# Altium PCB BEESC_v1.PcbDoc (part 4 of 4)
Units mm, origin at the board's own origin, x right, y up, seen from the top; angles counter-clockwise.
Board outline 50 x 44.5 mm, 6 copper layers (Top Layer, GND, SIG, SIG/PWR, GND2, Bottom Layer), stack 1.481 mm thick; 122 components, 109 nets, 495 pads, 357 vias.
Unrouted connection lines stored in the file: 71.
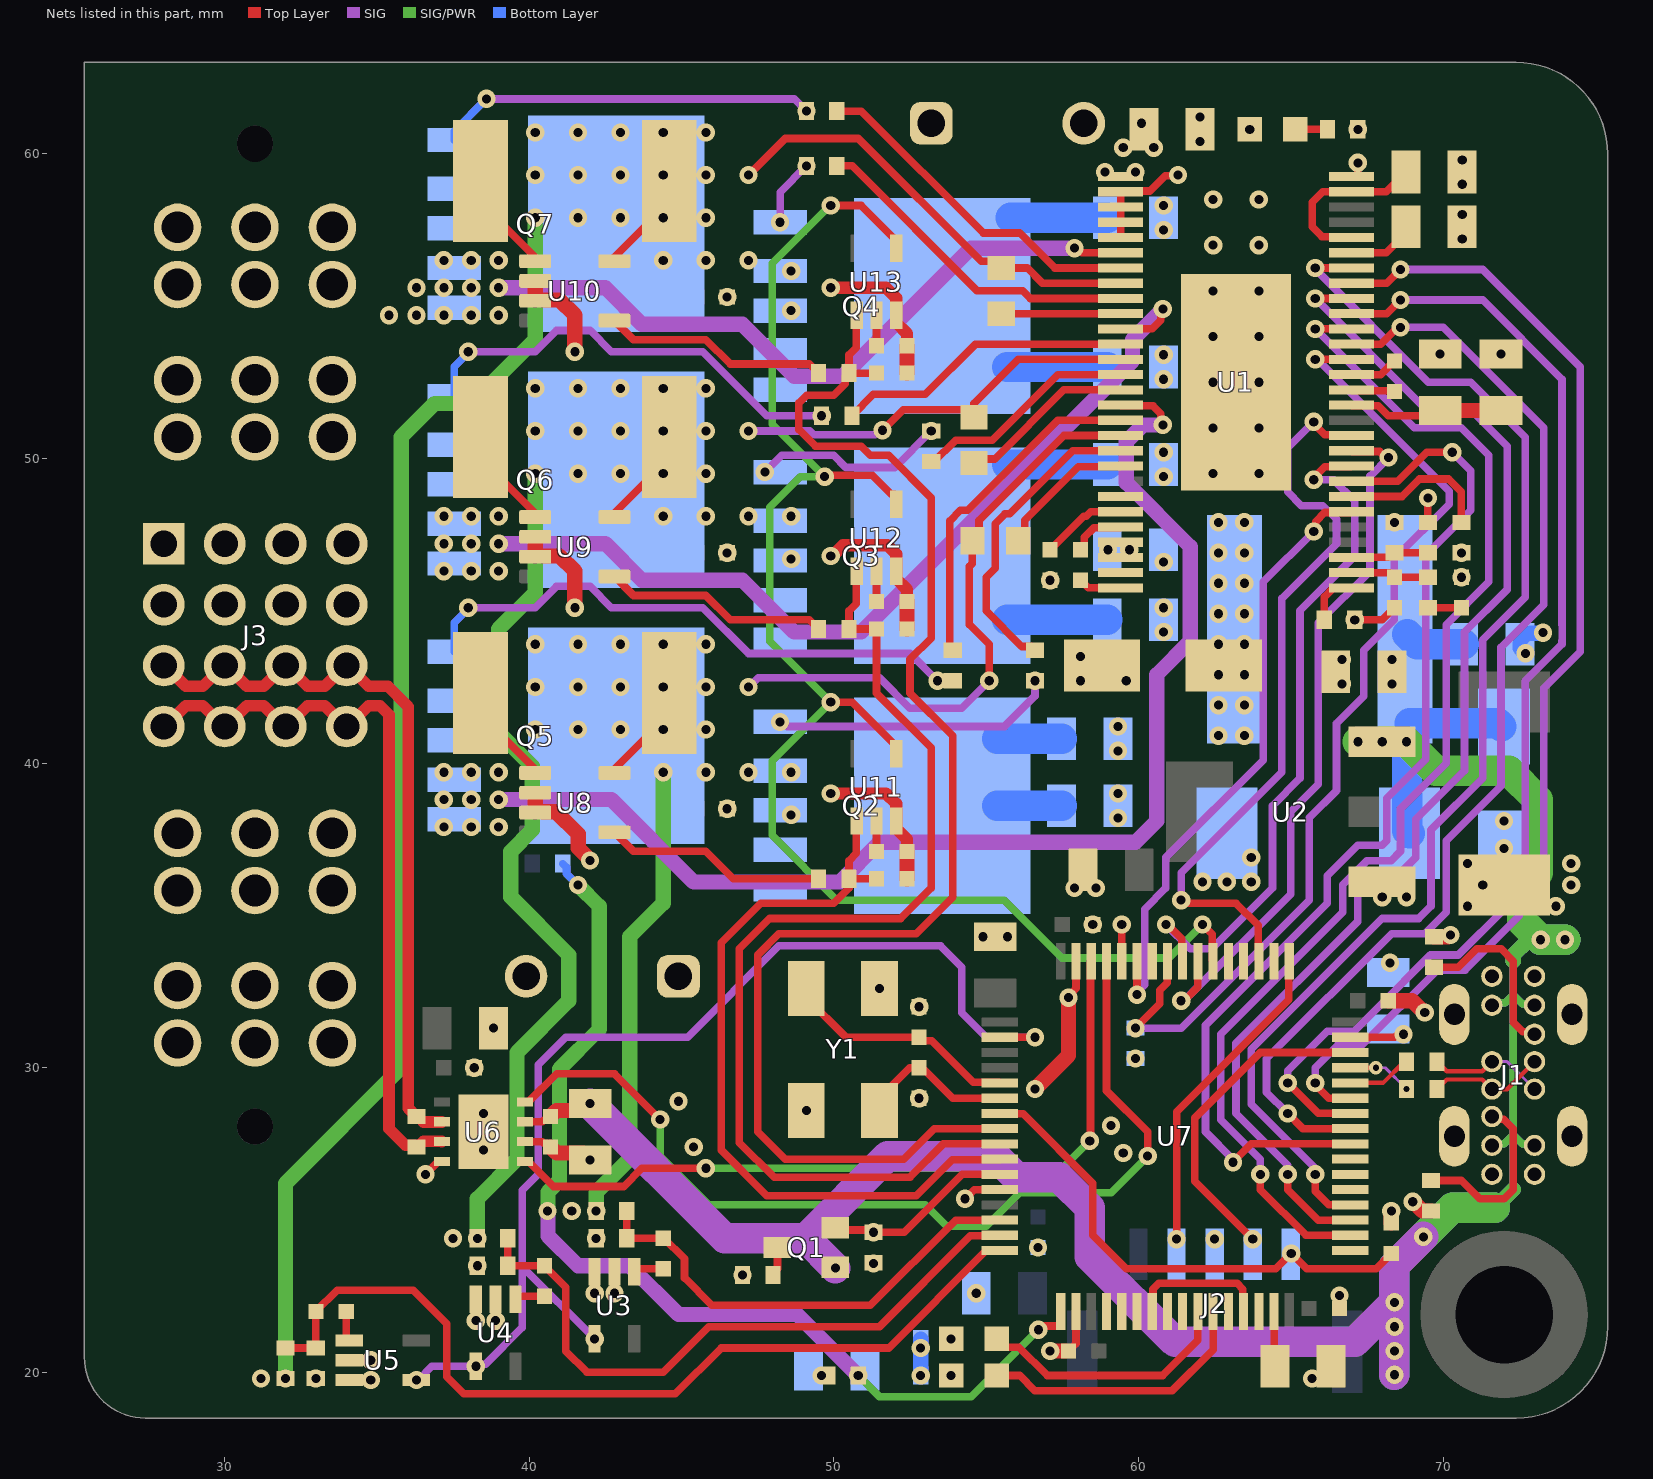
[diagram p6: the nets of this part, all layers, seen from the top]

## Via types
v1: diameter 0.6, hole 0.3, Top Layer to Bottom Layer, tented both sides, 355 vias
v2: diameter 0.45, hole 0.2, Top Layer to Bottom Layer, tented both sides, 2 vias

## Nets (pads, with @x,y where several pads share a name; then routed paths per layer and width w, separated by ;. In a path a pad name is that pad's centre, name@x,y a point inside that pad or via, vN(x,y) a via of type N, cw(c..) or ccw(c..) an arc to the next point about the centre after c; other vN are vias at no path point) (continued)
+5: C8.1 C10.2 C11.1 C23.1 C24.1 D2.1 J1.A4 J1.A9 J1.B4 J1.B9 L1.2 Q1.1 R4.1 U2.3 U6.3 | length 104.8
  Top Layer w0.25: U6.3@39.862,28.225 40.429,28.225 40.479,28.275 40.575,28.275 C24.1@40.7,28.4
  Top Layer w0.5: C24.1@40.7,28.4 40.9,28.6 41.775,28.6 v1(42,28.825)
  SIG w1: v1(42,28.825) 46.425,24.4 49.075,24.4 ; v1(50.05,23.425) 49.075,24.4 ; v1(68.4,19.921) v1(68.4,20.7) v1(68.4,21.5) v1(68.4,22.3) ; v1(69.35,24.45) 68.4,23.5 v1(68.4,22.3) ; 49.075,24.4 51.775,27.1 55.3,27.1 56,26.4 57.4,26.4 58.4,25.4 58.4,23.8 61.2,21 67.1,21 v1(68.4,22.3)
  SIG/PWR w0.25: J1.B4@71.6,27.45 71.65,27.5 72,27.5 72.3,27.8 ; J1.B9@71.6,32.05 71.686,32.136 72.036,32.136 72.3,32.4 ; 72.3,26 72.3,27.8 ; 72.3,33.5 72.3,32.4 ; J1.A9@73,27.45 72.95,27.5 72.6,27.5 72.3,27.8 ; J1.A4@73,32.05 72.95,32.1 72.6,32.1 72.3,32.4 ; 72.3,27.8 72.3,32.4
  SIG/PWR w0.5: 71.7,25.4 72.3,26 ; 72.3,33.5 72.3,33.7 72.781,34.181 73.181,34.181 v1(73.2,34.2)
  SIG/PWR w1: v1(67.2,40.7) v1(68,40.7) v1(68.8,40.7) 69.76,39.74 72.16,39.74 73.1,38.8 73.1,36.4 72.6,35.9 72.6,34.8 v1(73.2,34.2) v1(74,34.2) ; v1(68.4,19.921) v1(68.4,20.7) v1(68.4,21.5) v1(68.4,22.3) 68.4,23.5 v1(69.35,24.45) 70.3,25.4 71.7,25.4
  Bottom Layer w0.25: J1.B4@71.6,27.45 71.65,27.5 72,27.5 72.3,27.8 ; J1.B9@71.6,32.05 71.686,32.136 72.036,32.136 72.3,32.4 ; 72.3,26 72.3,27.8 ; 72.3,33.5 72.3,32.4 ; J1.A9@73,27.45 72.95,27.5 72.6,27.5 72.3,27.8 ; J1.A4@73,32.05 72.95,32.1 72.6,32.1 72.3,32.4 ; 72.3,27.8 72.3,32.4
  Bottom Layer w0.5: 71.7,25.4 72.3,26 ; 72.3,33.5 72.3,33.7 72.781,34.181 73.181,34.181 v1(73.2,34.2)
  Bottom Layer w1: v1(68.4,19.921) v1(68.4,20.7) v1(68.4,21.5) v1(68.4,22.3) 68.4,23.5 v1(69.35,24.45) 70.3,25.4 71.7,25.4 ; L1.2@68.825,40.7 68.825,37.775 C10.2@68.9,37.7 ; L1.2@68.825,44.225 69.15,43.9 C11.1@70.675,43.9 ; L1.2@68.9,41.3 71.8,41.3 D2.1@71.9,41.2 ; v1(73.2,34.2) v1(74,34.2)
  other v1: 68.325,42.6 68.325,43.4 68.4,47.9
ADC_15: U7.25
ADC_TEMP: C56.1 R33.1 R34.2 U7.17 | length 33.9
  Top Layer w0.25: v1(56.713,21.4) 56.807,21.4 56.932,21.525 57.425,21.525 57.45,21.55 U7.17@57.45,22
  SIG w0.5: v1@40.619,25.281 40.619,24.481 41.6,23.5 43.3,23.5 44.9,21.9 48.8,21.9 v1(50.8,19.9)
  SIG/PWR w0.25: v1(50.8,19.9) 51.5,19.2 54.513,19.2 v1(56.713,21.4)
  SIG/PWR w0.5: v1@40.619,25.281 v1(40.6,25.3) 40.619,25.319 40.619,25.919 41,26.3 41,29.963 42.3,31.263 42.3,35.3 v1(41.6,36)
  Bottom Layer w0.25: R33.1@41.1,36.7 41.225,36.575 41.225,36.375 v1(41.6,36)
AN_IN: Q1.2 R12.2 U7.11 | length 6.2
  Top Layer w0.25: Q1.2@50.05,24.75 50.125,24.675 51.225,24.675 v1(51.3,24.6) 52.316,24.6 54.216,26.5 U7.11@55.45,26.5
C_A: R30.1 U8.5 | length 7.3
  Top Layer w0.25: U8.5@42.8,37.725 43.425,37.1 45.8,37.1 46.7,36.2 R30.1@49.5,36.2
C_B: R31.1 U9.5 | length 7.4
  Top Layer w0.25: U9.5@42.8,46.125 43.425,45.5 45.8,45.5 46.6,44.7 49.2,44.7 R31.1@49.5,44.4
C_C: R32.1 U10.5 | length 7.4
  Top Layer w0.25: U10.5@42.8,54.525 43.425,53.9 45.8,53.9 46.6,53.1 49.2,53.1 R32.1@49.5,52.8
CAN_N: J3.A03 J3.B03 J3.C03 J3.D03 R20.1 U6.6 | length 24.8
  Top Layer w0.381: J3.A03@28.01,43.2 28.044,43.2 28.727,42.518 29.293,42.518 29.976,43.2 J3.B03@30.01,43.2 30.044,43.2 30.727,42.518 31.293,42.518 31.976,43.2 J3.C03@32.01,43.2 32.044,43.2 32.727,42.518 33.293,42.518 33.976,43.2 J3.D03@34.01,43.2 34.044,43.2 34.727,42.518 35.366,42.518 36.035,41.849 36.035,28.665 R20.1@36.3,28.4 36.35,28.4 36.532,28.218 37.13,28.218 U6.6@37.138,28.225
CAN_P: J3.A04 J3.B04 J3.C04 J3.D04 R20.2 U6.7 | length 25.1
  Top Layer w0.381: J3.A04@28.01,41.2 28.044,41.2 28.727,41.883 29.293,41.883 29.976,41.2 J3.B04@30.01,41.2 30.044,41.2 30.727,41.883 31.293,41.883 31.976,41.2 J3.C04@32.01,41.2 32.044,41.2 32.727,41.883 33.293,41.883 33.976,41.2 J3.D04@34.01,41.2 34.044,41.2 34.727,41.883 35.103,41.883 35.4,41.586 35.4,28 35.94,27.46 36.241,27.46 R20.2@36.3,27.4 36.35,27.4 36.532,27.583 37.13,27.583 U6.7@37.138,27.575
CAN_RX: U6.4 U7.61 | length 31.5
  Top Layer w0.25: U6.4@39.862,28.875 39.975,28.875 40.9,29.8 42.8,29.8 v1(44.3,28.3) ; U7.61@58.95,33.5 58.95,29.25 60.3,27.9 v1(60.3,27.1)
  SIG/PWR w0.25: v1(44.3,28.3) 44.3,27.1 45.9,25.5 53,25.5 53.7,24.8 55,24.8 56.1,25.9 59.1,25.9 v1(60.3,27.1)
CAN_TX: U6.1 U7.62 | length 25.7
  Top Layer w0.25: U6.1@39.862,26.925 39.975,26.925 40.8,26.1 43.1,26.1 43.7,26.7 v1(45.8,26.7) ; v1(58.4,27.6) 58.425,27.625 58.425,33.475 U7.62@58.45,33.5
  SIG/PWR w0.25: v1(45.8,26.7) 55.9,26.7 56.2,26.4 57.2,26.4 v1(58.4,27.6)
CS: U1.8 U7.40 | length 35.8
  Top Layer w0.25: v1(63.1,26.9) 63.7,27.5 U7.40@66.95,27.5 ; U1.8@66.988,49.25 68.514,49.25 69.464,50.2 v1(70.3,50.2)
  SIG w0.25: v1(63.1,26.9) 63.1,26.995 62.2,27.895 62.2,31.4 66.2,35.4 66.2,36.3 67.2,37.3 68.004,37.3 68.15,37.446 68.15,38.85 69.425,40.125 69.425,46.825 70.9,48.3 70.9,49.6 v1(70.3,50.2)
CURR_A: C48.1 R30.2 U7.10 U11.1 | length 25.2
  Top Layer w0.25: U11.1@50.75,38.1 50.735,38.084 50.735,37.034 50.5,36.8 R30.2@50.5,36.2 ; C48.1@51.4,36.2 R30.2@50.5,36.2 ; U7.10@55.45,27 55.435,26.985 53.885,26.985 52.7,25.8 47.8,25.8 46.3,27.3 46.3,34.1 47.6,35.4 50,35.4 50.5,35.9 R30.2@50.5,36.2
CURR_B: C50.1 R31.2 U7.9 U12.1 | length 35.1
  Top Layer w0.25: U12.1@50.75,46.3 50.735,46.284 50.735,45.234 50.5,45 R31.2@50.5,44.4 C50.1@51.4,44.4 51.4,42.3 53.2,40.5 53.2,35.9 52.2,34.9 47.9,34.9 46.9,33.9 46.9,27.545 48.045,26.4 52.5,26.4 53.6,27.5 U7.9@55.45,27.5
CURR_C: C52.1 R32.2 U7.8 U13.1 | length 46.3
  Top Layer w0.25: U13.1@50.75,54.7 50.735,54.685 50.735,53.635 50.5,53.4 R32.2@50.5,52.8 ; C52.1@51.4,52.8 R32.2@50.5,52.8 ; 54.85,28 53.3,28 52.3,27 48.4,27 47.5,27.9 47.5,33.7 48.2,34.4 52.7,34.4 53.9,35.6 53.9,40.9 52.5,42.3 52.5,43.4 53.2,44.1 53.2,48.7 51.8,50.1 51.2,50.1 50.9,50.4 49.4,50.4 48.85,50.95 48.85,51.818 49.107,52.075 49.994,52.075 50.375,52.456 50.375,52.675 R32.2@50.5,52.8
CURR_FILTER: U7.54 U11.4 U12.4 U13.4 | length 51.4
  Top Layer w0.25: v1(49.7,49.4) 49.75,49.45 51.263,49.45 51.888,48.825 51.975,48.825 52.05,48.75 U12.4@52.05,48.5 ; v1(49.9,42) 50.6,42 52.05,40.55 U11.4@52.05,40.3 ; v1(49.9,58.3) 50.9,58.3 52.05,57.15 U13.4@52.05,56.9 ; v1(62.1,34.7) 62.425,34.375 62.425,33.525 U7.54@62.45,33.5
  SIG/PWR w0.25: v1(49.9,58.3) 49.866,58.3 47.975,56.409 47.975,51.125 v1(49.7,49.4) 48.9,49.4 47.9,48.4 47.9,44 v1(49.9,42) 47.975,40.075 47.975,37.625 50.1,35.5 55.6,35.5 57.5,33.6 61,33.6 v1(62.1,34.7)
D2_N: J1.A7 J1.B7 R36.1 | length 3.8
  Top Layer w0.146: R36.1@69.8,30.2 70.114,29.886 71.286,29.886 J1.B7@71.6,30.2
  SIG w0.097: J1.B7@71.6,30.2 72.1,30.2 J1.A7@73,29.3
D2_P: J1.A6 J1.B6 R35.1 | length 3.8
  Top Layer w0.146: R35.1@69.8,29.3 70.114,29.614 71.286,29.614 J1.B6@71.6,29.3 72.1,29.3 J1.A6@73,30.2
D_N: R36.2 U7.44 | length 2.1
  Top Layer w0.146: U7.44@66.95,29.5 68.025,29.5 68.725,30.2 R36.2@68.8,30.2
D_P: R35.2 U7.45 | length 2.1
  Top Layer w0.146: U7.45@66.95,30 v2(67.791,30)
  SIG w0.097: v2(67.791,30) 68.1,30 v2(68.8,29.3)
EN_BUCK: U1.55
EN_GATE: R6.2 U1.16 U7.57 | length 32.8
  Top Layer w0.25: v1(59.9,31.3) 60.7,32.1 60.7,32.54 60.95,32.79 U7.57@60.95,33.5 ; v1(65.8,53.25) U1.16@66.988,53.25
  SIG w0.25: v1(59.9,31.3) 61.4,31.3 65.6,35.5 65.6,38.2 66.5,39.1 66.5,41.3 67.4,42.2 67.4,43.7 68.4,44.7 68.4,46.7 70.2,48.5 70.2,48.921 65.871,53.25 v1(65.8,53.25)
FAULT: U1.6 U7.59 | length 20.4
  Top Layer w0.25: v1(59.95,32.4) U7.59@59.95,33.5 ; v1(65.75,47.6) 65.817,47.667 65.817,47.927 66.116,48.225 66.963,48.225 U1.6@66.988,48.25
  SIG w0.25: v1(59.95,32.4) 59.95,32.471 60.2,32.721 60.2,35.2 60.9,35.9 60.9,36.9 64.1,40.1 64.1,45.949 v1(65.75,47.6)
GH_A: R21.1 U1.47 | length 10.2
  Top Layer w0.25: R21.1@56.6,43.7 56.475,43.825 56.175,43.825 55,45 55,46.1 55.3,46.4 55.3,47.86 55.62,48.18 55.78,48.18 57.85,50.25 U1.47@59.412,50.25
GH_B: R22.1 U1.42 | length 7.4
  Top Layer w0.25: R22.1@53.25,49.85 54,50.6 55.2,50.6 57.35,52.75 U1.42@59.412,52.75
GH_C: R23.1 U1.37 | length 11.1
  Top Layer w0.25: R23.1@50.1,59.6 50.6,59.6 54.7,55.5 56.2,55.5 56.45,55.25 U1.37@59.412,55.25
GL_A: R27.1 U1.45 | length 11.3
  Top Layer w0.25: R27.1@53.9,43.7 53.8,43.8 53.8,47.944 54.156,48.3 54.4,48.3 57.35,51.25 U1.45@59.412,51.25
GL_B: R28.1 U1.40 | length 9.8
  Top Layer w0.25: R28.1@50.6,51.4 51.3,52.1 53,52.1 54.65,53.75 U1.40@59.412,53.75
GL_C: R29.1 U1.35 | length 11.4
  Top Layer w0.25: R29.1@50.1,61.4 50.9,61.4 54.9,57.4 56.1,57.4 57.25,56.25 U1.35@59.412,56.25
GND: C1.2 C2.2 C3.2 C4.2 C6.1 C7.2 C8.2 C10.1 C11.2 C13.2 C14.2 C17.2 C18.2 C19.2 C23.2 C24.2 C25.2 C26.2 C27.2 C28.2 C29.1 C30.1 C31.2 C32.2 C33.2 C34.2 C35.2 C36.2 C37.2 C38.2 C39.2 C40.2 C41.2 C42.2 C43.2 C44.2 C45.2 C46.2 C47.2 C48.2 C49.2 C50.2 C51.2 C52.2 C53.2 C54.2 C55.2 C56.2 D1.2 D2.2 J1.0 J1.A1 J1.A12 J1.B1 J1.B12 J2.3 J3.P03_1 J3.P03_2 J3.P03_3 J3.P03_4 J3.P03_5 J3.P03_6 Q5.1 Q5.2 Q5.3 Q5.4 Q6.1 Q6.2 Q6.3 Q6.4 Q7.1 Q7.2 Q7.3 Q7.4 R1.2 R2.2 R5.1 R6.1 R9.2 R10.2 R12.1 R14.2 R15.2 R16.2 R17.2 R18.2 R19.2 R34.1 U1.28 U1.30 U1.31 U1.32 U1.33 U1.34 U1.39 U1.44 U1.57 U2.1 U3.2 U3.3 U4.2 U4.3 U5.2 U5.3 U6.2 U6.8 U6.9 U7.12 U7.18 U7.60 U7.63 U8.2 U8.3 U9.2 U9.3 U10.2 U10.3 U11.3 U12.3 U13.3 Y1.2 Y1.4 | length 147.7
  Top Layer w0.25: U5.3@34.1,19.75 v1(34.8,19.75) ; U5.2@34.1,20.4 v1(34.8,20.4) ; v1(36.6,26.5) 37.025,26.925 U6.8@37.138,26.925 ; v1(38.25,21.7) U4.3@38.25,22.4 ; v1(38.9,21.7) U4.2@38.9,22.4 ; U6.2@39.862,27.575 40.429,27.575 40.479,27.525 40.575,27.525 C24.2@40.7,27.4 ; v1(42.15,22.6) U3.3@42.15,23.3 ; v1(42.8,22.6) U3.2@42.8,23.3 ; v1(49.6,19.9) R34.1@49.8,19.9 ; v1(54.308,25.7) 54.608,26 U7.12@55.45,26 ; C31.2@57.7,20.7 57.95,20.95 U7.18@57.95,22 ; v1(57.7,32.3) 57.7,32.358 57.95,32.608 U7.63@57.95,33.5 ; v1(57.9,56.9) 57.995,56.9 58.145,56.75 U1.34@59.412,56.75 ; U1.44@59.412,51.75 59.437,51.725 60.475,51.725 60.733,51.467 60.733,51.167 v1(60.8,51.1) ; U1.39@59.412,54.25 60.45,54.25 60.733,54.533 60.733,54.833 v1(60.8,54.9) ; U1.33@59.412,57.25 U1.32@59.412,57.75 U1.31@59.412,58.25 U1.30@59.412,58.75 59.437,58.775 60.375,58.775 60.873,59.273 61.273,59.273 v1(61.3,59.3) ; U7.60@59.45,33.5 v1(59.45,34.7) ; v1(65.7,19.8) 65.975,19.8 66.325,20.15 C38.2@66.325,20.2 ; C32.2@66.6,22.1 v1(66.6,22.525) ; U1.28@66.988,59.25 67.175,59.25 67.2,59.275 v1(67.2,59.7) ; v1(67.1,44.7) 68,44.7 C2.2@68.4,45.1 ; R1.2@69.5,47.9 v1(69.5,48.7)
  Top Layer w0.4: v1(49.9,39) 51.716,39 52.05,38.665 U11.3@52.05,38.1 52.05,37.85 52.4,37.5 C49.2@52.4,37.1 ; v1(49.9,46.8) 49.954,46.8 50.304,47.15 51.766,47.15 52.05,46.865 52.05,46.05 52.4,45.7 C51.2@52.4,45.3 ; v1(49.9,55.6) 51.716,55.6 52.05,55.266 U13.3@52.05,54.7 52.05,54.45 52.4,54.1 C53.2@52.4,53.7
  Top Layer w0.5: U8.3@40.2,38.4 U8.2@40.2,39 ; U9.3@40.2,46.8 U9.2@40.2,47.4 ; U10.3@40.2,55.2 U10.2@40.2,55.8 ; U8.3@40.475,38.4 40.882,38.4 41.613,37.669 41.613,37.214 42,36.827 v1(42,36.8) ; U9.3@40.475,46.8 41,46.8 41.5,46.3 v1(41.5,45.1) ; U10.3@40.475,55.2 41,55.2 41.5,54.7 v1(41.5,53.5) ; C24.2@40.7,27.4 40.9,27.2 41.775,27.2 v1(42,26.975) ; C48.2@52.4,36.2 C49.2@52.4,37.1 ; C50.2@52.4,44.4 C51.2@52.4,45.3 ; C52.2@52.4,52.8 C53.2@52.4,53.7 ; v1(56.6,29.3) 57.7,30.4 v1(57.7,32.3) ; v1(57.1,20.7) C31.2@57.7,20.7 ; C33.2@68.2,32.2 68.981,32.2 69.369,31.812 v1(69.396,31.812) ; C36.2@68.3,24.9 v1(68.3,25.3) ; v1(69,25.6) 69.027,25.6 69.327,25.3 R16.2@69.6,25.3 ; R15.2@69.7,34.3 70.157,34.3 70.215,34.358 v1(70.242,34.358)
  SIG w0.5: v1(39,38.8) 42.7,38.8 45.4,36.1 50.2,36.1 51.5,37.4 59.9,37.4 60.6,38.1 60.6,42.9 61.7,44 61.7,47.1 59.6,49.2 59.6,50.55 60.15,51.1 v1(60.8,51.1) ; v1(39,47.2) 42.5,47.2 43.7,46 47,46 48.7,44.3 50.9,44.3 59.8,53.2 59.8,53.9 v1(60.8,54.9) ; v1(39,55.6) 42.5,55.6 43.7,54.4 47,54.4 48.7,52.7 50.3,52.7 54.5,56.9 v1(57.9,56.9)
  Bottom Layer w0.5: v1(52.85,19.9) R19.2@52.85,21.1 ; v1(72.7,43.6) 72.525,43.775 72.525,44.037 72.75,44.262 73.262,44.262 v1(73.281,44.281)
  other v1: 31.2,19.8 33,19.8 52.85,20.8 54.675,22.6 38.3,23.5 51.3,23.575 56.7,24.1 62.5,24.375 37.5,24.4 42.2,24.4 41.4,25.3 59.5,27.2 38.5,27.3 45.4,27.4 59.1,28.1 38.5,28.5 49.1,28.6 44.9,28.9 52.8,29 38.2,30 59.9,30.3 38.825,31.3 52.8,32 51.5,32.6 68.258,33.442 54.9,34.3 55.7,34.3 58.5,34.7 70.8,35.3 73.7,35.3 68,35.6 68.8,35.6 57.9,35.9 58.6,35.9 71.3,36 74.2,36 62.1,36.1 62.9,36.1 63.7,36.1 70.8,36.7 74.2,36.7 63.7,36.9 72,37.2 37.2,37.9 38.1,37.9 39,37.9 72,38.1 59.325,38.2 46.5,38.5 37.2,38.8 38.1,38.8 59.325,39 37.2,39.7 38.1,39.7 39,39.7 59.325,40.4 59.325,41.2 66.675,42.6 58.1,42.7 59.6,42.7 66.675,43.4 58.1,43.5 60.825,44.3 60.825,45.1 57.1,46 70.6,46.1 37.2,46.3 38.1,46.3 39,46.3 60.825,46.6 46.5,46.9 70.6,46.9 37.2,47.2 38.1,47.2 37.2,48.1 38.1,48.1 39,48.1 60.825,49.4 62.45,49.5 63.95,49.5 60.825,50.2 62.45,51 63.95,51 62.45,52.5 63.95,52.5 60.825,52.6 60.825,53.4 69.9,53.425 71.9,53.425 62.45,54 63.95,54 35.4,54.7 36.3,54.7 37.2,54.7 38.1,54.7 39,54.7 46.5,55.3 62.45,55.5 63.95,55.5 36.3,55.6 37.2,55.6 38.1,55.6 37.2,56.5 38.1,56.5 39,56.5 62.45,57 63.95,57 70.625,57.2 60.825,57.5 70.625,58 60.825,58.3 62.45,58.5 63.95,58.5 70.625,59 70.625,59.8 62.025,60.4 67.2,60.8 62.025,61.2
H1: U1.17 U7.41 | length 37.3
  Top Layer w0.25: v1(64.9,28.5) 65.4,28 U7.41@66.95,28 ; U1.17@66.988,53.75 67.955,53.75 v1@68.553,54.347
  SIG w0.25: v1(64.9,28.5) 64.2,29.2 64.2,30.293 68.307,34.4 69.4,34.4 70.1,35.1 70.1,37.454 71.9,39.254 71.9,43.8 73.3,45.2 73.3,51 70,54.3 v1(68.6,54.3)
H2: U1.19 U7.42 | length 38.5
  Top Layer w0.25: v1(64.9,29.5) 65.9,28.5 U7.42@66.95,28.5 ; U1.19@66.988,54.75 68.15,54.75 v1(68.6,55.2)
  SIG w0.25: v1(64.9,29.5) 64.9,29.9 66.2,31.2 67.084,31.2 67.825,31.941 69.584,33.7 70.5,33.7 72,35.2 72,36.2 72.7,36.9 72.7,42.7 73.9,43.9 73.9,44.016 73.906,44.022 73.906,44.54 73.9,44.546 73.9,52.6 71.3,55.2 v1(68.6,55.2)
H3: U1.21 U7.43 | length 38.5
  Top Layer w0.25: v1(65.8,29.5) 65.8,29.44 66.24,29 U7.43@66.95,29 ; U1.21@66.988,55.75 68.15,55.75 v1(68.6,56.2)
  SIG w0.25: v1(65.8,29.5) 65.8,30 66.55,30.75 67.35,30.75 69.8,33.2 70.716,33.2 72.5,34.984 72.5,35.9 73.3,36.7 73.3,42.451 74.5,43.651 74.5,53 71.3,56.2 v1(68.6,56.2)
HALL_1: U7.37
HALL_2: U7.38
HALL_3: U7.39
INL_A: U1.18 U7.34 | length 40.9
  Top Layer w0.25: v1(64,26.5) 64,26 65.5,24.5 U7.34@66.95,24.5 ; v1(65.8,54.25) U1.18@66.988,54.25
  SIG w0.25: v1(64,26.5) 64,27 62.7,28.3 62.7,31.1 66.7,35.1 66.7,36 67.5,36.8 68.3,36.8 68.6,37.1 68.6,38.5 70.1,40 70.1,44.546 71.5,45.946 71.5,50.1 70.6,51 69.05,51 v1(65.8,54.25)
INL_B: U1.20 U7.35 | length 41.2
  Top Layer w0.25: v1(64.9,26.5) 64.9,26 65.9,25 U7.35@66.95,25 ; v1(65.8,55.25) U1.20@66.988,55.25
  SIG w0.25: v1(64.9,26.5) 64.9,26.8 63.2,28.5 63.2,30.8 67.2,34.8 67.2,35.8 67.7,36.3 68.5,36.3 69.1,36.9 69.1,38.151 70.7,39.751 70.7,44.297 72.1,45.697 72.1,50.4 70.8,51.7 69.35,51.7 v1(65.8,55.25)
INL_C: U1.22 U7.36 | length 41.8
  Top Layer w0.25: v1(65.8,26.5) 65.8,25.94 66.24,25.5 U7.36@66.95,25.5 ; v1(65.8,56.25) U1.22@66.988,56.25
  SIG w0.25: v1(65.8,26.5) 65.8,26.7 63.7,28.8 63.7,30.6 68,34.9 69.2,34.9 69.6,35.3 69.6,37.803 71.3,39.503 71.3,44.049 72.7,45.449 72.7,50.7 70.9,52.5 69.516,52.5 65.8,56.216 v1(65.8,56.25)
LED_GREEN: D5.2 U7.26 | length 8.5
  Top Layer w0.25: D5.2@55.35,21.1 55.625,20.825 56.075,20.825 57,19.9 60.8,19.9 61.95,21.05 U7.26@61.95,22
LED_RED: D4.2 U7.27 | length 9.1
  Top Layer w0.25: D4.2@55.35,19.9 56.1,19.9 56.6,19.4 61.1,19.4 62.45,20.75 U7.27@62.45,22
MISO_ADC_EXT2: U7.22
NetC1_1: C1.1 R3.2 | length 1.1
  Top Layer w0.25: R3.2@69.5,45.1 C1.1@70.6,45.1
NetC2_1: C2.1 R3.1 U1.2 | length 2.6
  Top Layer w0.25: U1.2@66.988,46.25 68.25,46.25 C2.1@68.4,46.1 R3.1@69.5,46.1
NetC3_1: C3.1 U1.56 | length 1.4
  Top Layer w0.25: C3.1@58.1,46 58.35,45.75 U1.56@59.412,45.75
NetC5_1: C5.1 U1.52 | length 1.6
  Top Layer w0.25: C5.1@58.2,47.1 58.225,47.125 58.225,47.41 58.54,47.725 59.387,47.725 U1.52@59.412,47.75
NetC5_2: C5.2 D1.1 L1.1 U1.50 U1.51 | length 2.8
  Top Layer w0.25: C5.2@57.1,47 58.2,48.1 58.278,48.1 58.428,48.25 U1.51@59.412,48.25
  other v1: 62.625,40.9 63.475,40.9 62.625,41.9 63.475,41.9 62.625,42.9 63.475,42.9 62.625,43.9 63.475,43.9 62.625,44.9 63.475,44.9 62.625,45.9 63.475,45.9 62.625,46.9 63.475,46.9 62.625,47.9 63.475,47.9
NetC9_1: C9.1 U1.48 | length 4.6
  Top Layer w0.25: C9.1@56.05,47.3 56.265,47.515 56.265,47.965 58.025,49.725 59.387,49.725 U1.48@59.412,49.75
NetC12_1: C12.1 U1.43 | length 5.8
  Top Layer w0.25: C12.1@54.6,49.879 54.7,49.979 55.279,49.979 57.55,52.25 U1.43@59.412,52.25
NetC13_1: C13.1 C14.1 U1.13 | length 5.1
  Top Layer w0.25: U1.13@66.988,51.75 67.013,51.725 67.875,51.725 68.2,51.4 69.725,51.4 C13.1@69.9,51.575
  Top Layer w0.5: C13.1@69.9,51.575 C14.1@71.9,51.575
NetC15_1: C15.1 U1.14 | length 1.4
  Top Layer w0.25: U1.14@66.988,52.25 67.013,52.225 68.375,52.225 C15.1@68.4,52.2
NetC15_2: C15.2 U1.15 | length 1.6
  Top Layer w0.25: U1.15@66.988,52.75 67.95,52.75 C15.2@68.4,53.2
NetC16_1: C16.1 U1.38 | length 3.9
  Top Layer w0.25: C16.1@55.5,54.75 U1.38@59.412,54.75
NetC17_1: C17.1 U1.23 | length 2.3
  Top Layer w0.25: U1.23@66.988,56.75 68.125,56.75 68.775,57.4 C17.1@68.775,57.6
NetC18_1: C18.1 U1.24 U1.27 | length 5.7
  Top Layer w0.25: U1.24@66.988,57.25 66.963,57.275 66.025,57.275 65.7,57.6 65.7,58.4 66.05,58.75 U1.27@66.988,58.75 68.125,58.75 C18.1@68.775,59.4
NetC20_2: C20.2 U3.1 | length 1
  Top Layer w0.25: U3.1@43.45,23.3 43.45,23.325 43.525,23.4 C20.2@44.4,23.4
NetC21_2: C21.2 U4.1 | length 1
  Top Layer w0.25: U4.1@39.55,22.4 39.55,22.425 39.625,22.5 C21.2@40.5,22.5
NetC22_2: C22.2 U5.1 | length 1
  Top Layer w0.25: C22.2@34,22 34,21.125 34.075,21.05 U5.1@34.1,21.05
NetC29_2: C29.2 U7.5 Y1.1 | length 7.8
  Top Layer w0.25: Y1.1@49.1,32.6 49.1,32.3 50.4,31 C29.2@52.8,31 52.915,30.885 53.215,30.885 54.575,29.525 55.425,29.525 U7.5@55.45,29.5
NetC30_2: C30.2 U7.6 Y1.3 | length 5.1
  Top Layer w0.25: Y1.3@51.5,28.6 51.5,29 52.5,30 C30.2@52.8,30 ; C30.2@52.85,30.05 53.9,29 U7.6@55.45,29
NetC37_1: C37.1 U7.47 | length 1.8
  Top Layer w0.25: U7.47@66.95,31 68.405,31 68.438,31.033 68.633,31.033 v1(68.7,31.1)
NetC38_1: C38.1 U7.31 | length 1.8
  Top Layer w0.25: U7.31@64.45,22 64.45,20.225 C38.1@64.475,20.2
NetC49_1: C49.1 U11.2 | length 1
  Top Layer w0.25: C49.1@51.4,37.1 U11.2@51.4,38.1
NetC51_1: C51.1 U12.2 | length 1
  Top Layer w0.25: C51.1@51.4,45.3 U12.2@51.4,46.3
NetC53_1: C53.1 U13.2 | length 1
  Top Layer w0.25: C53.1@51.4,53.7 U13.2@51.4,54.7
NetD3_1: D3.1 R17.1 | length 1.1
  Top Layer w0.25: D3.1@65.15,60.8 R17.1@66.2,60.8
NetD4_1: D4.1 R18.1
  other v1: 53.85,19.9
NetD5_1: D5.1 R19.1
  other v1: 53.85,21.1
NetJ1_A5: J1.A5 R15.1 | length 5.9
  Top Layer w0.25: R15.1@69.7,33.3 70.5,33.3 71.1,33.9 71.9,33.9 72.3,33.5 72.3,31.5 72.614,31.186 72.914,31.186 J1.A5@73,31.1
  SIG w0.25: J1.A5@72.996,31.1 J1.A5@73,31.1
NetJ1_B5: J1.B5 R16.1 | length 5.9
  Top Layer w0.25: R16.1@69.6,26.3 70.6,26.3 71.2,25.7 72,25.7 72.3,26 72.3,28 71.986,28.314 71.686,28.314 J1.B5@71.6,28.4
NetQ1_3: Q1.3 R11.1 | length 1
  Top Layer w0.25: R11.1@48,23.2 48,23.25 48.15,23.4 Q1.3@48.15,24.1
NetQ2_5: Q2.5 R21.2 | length 9.3
  SIG w0.254: v1(48.237,41.35) 48.331,41.35 48.481,41.2 55.6,41.2 56.6,42.2 v1(56.6,42.7)
NetQ3_5: Q3.5 R22.2 | length 6.4
  SIG w0.25: v1(47.737,49.55) 48.287,50.1 50,50.1 50.4,49.7 52,49.7 v1(53.2,50.9)
NetQ4_5: Q4.5 R23.2 | length 2.2
  SIG w0.25: v1(48.237,57.75) 48.237,58.737 v1(49.1,59.6)
NetQ5_5: Q5.5 R27.2 | length 19.1
  Top Layer w0.254: v1(53.4,42.7) R27.2@53.9,42.7
  SIG w0.254: v1(38,45.1) 40.2,45.1 40.9,45.8 42,45.8 42.7,45.1 45.7,45.1 47.2,43.6 52.5,43.6 v1(53.4,42.7)
  Bottom Layer w0.25: Q5.5@37.537,43.65 37.537,44.608 38,45.071 v1(38,45.1)
NetQ6_5: Q6.5 R28.2 | length 14.7
  SIG w0.25: 47.8,51.4 v1(49.6,51.4)
  SIG w0.254: v1(38,53.5) 40.2,53.5 40.9,54.2 42,54.2 42.7,53.5 45.7,53.5 47.8,51.4
  Bottom Layer w0.25: Q6.5@37.537,52.05 37.537,53.008 38,53.471 v1(38,53.5)
NetQ7_5: Q7.5 R29.2 | length 12.5
  SIG w0.254: v1(38.6,61.8) 48.7,61.8 v1(49.1,61.4)
  Bottom Layer w0.25: Q7.5@37.537,60.45 37.537,60.737 v1(38.6,61.8)
NetR1_1: R1.1 R4.2 U1.3 | length 2.6
  Top Layer w0.25: U1.3@66.988,46.75 68.2,46.75 68.35,46.9 R4.2@68.4,46.9 R1.1@69.5,46.9
NetR2_1: R2.1 U1.1 | length 1.8
  Top Layer w0.25: R2.1@66.1,44.7 66.1,45.45 66.4,45.75 U1.1@66.988,45.75
NetR5_2: R5.2 U1.7 | length 5
  Top Layer w0.25: U1.7@66.988,48.75 68.65,48.75 69.225,49.325 70.175,49.325 70.6,48.9 R5.2@70.6,47.9
NRF_SWCLK: U7.20
NRF_SWDIO: U7.33
NRST: C36.1 J2.1 U7.7 | length 16.6
  Top Layer w0.25: U7.7@55.45,28.5 55.465,28.485 56.215,28.485 58.5,26.2 58.5,24.5 59.6,23.4 64.51,23.4 v1(65.013,23.903) 65.517,23.4 67.8,23.4 C36.1@68.3,23.9
PA15: U7.50
PB2: U7.28
PC10_TX: U7.52
PC11_RX: U7.53
PC13: U3.4 U4.4 U5.4 U7.2 | length 37.6
  Top Layer w0.25: U7.2@55.45,31 v1(56.6,31)
  SIG w0.25: v1(36.3,19.75) 36.355,19.75 36.805,20.2 v1(38.25,20.2) 38.317,20.267 38.567,20.267 39.775,21.475 39.775,23.475 ; v1(42.15,21.1) 39.775,23.475 ; v1(56.6,31) 55,31 54.2,31.8 54.2,33.3 53.5,34 48.2,34 45.2,31 41.2,31 40.3,30.1 40.3,26.5 39.775,25.975 39.775,23.475
PH_A: J3.A01 J3.A02 J3.B01 J3.B02 J3.C01 J3.C02 J3.D01 J3.D02 R24.1 U8.1 | length 3.4
  Top Layer w0.25: R24.1@38.4,42.3 38.4,41.6 40.2,39.8 U8.1@40.2,39.675
PH_B: J3.P02_1 J3.P02_2 J3.P02_3 J3.P02_4 J3.P02_5 J3.P02_6 R25.1 U9.1 | length 3.4
  Top Layer w0.25: R25.1@38.4,50.7 38.4,50 40.2,48.2 U9.1@40.2,48.075
PH_C: J3.P01_1 J3.P01_2 J3.P01_3 J3.P01_4 J3.P01_5 J3.P01_6 R26.1 U10.1 | length 3.4
  Top Layer w0.25: R26.1@38.4,59.1 38.4,58.4 40.2,56.6 U10.1@40.2,56.475
RX_SDA_NSS: U7.30
SCK_ADC_EXT: U7.21
SCLK: U1.11 U7.51 | length 24.7
  Top Layer w0.25: v1@61.4,35.4 63.2,35.4 63.925,34.675 63.925,33.525 U7.51@63.95,33.5 ; v1(65.75,51.2) 65.75,51.14 66.116,50.775 66.963,50.775 U1.11@66.988,50.75
  SIG w0.25: v1(61.4,35.5) 61.4,36.4 64.7,39.7 64.7,45.4 66.5,47.2 66.5,48 66.05,48.45 65.35,48.45 64.9,48.9 64.9,50.35 v1(65.75,51.2)
SDI: U1.9 U7.56 | length 23
  Top Layer w0.25: v1(60.9,34.7) 60.96,34.7 61.425,34.235 61.425,33.525 U7.56@61.45,33.5 ; v1(65.75,49.3) 65.75,49.36 66.116,49.725 66.963,49.725 U1.9@66.988,49.75
  SIG w0.25: v1(60.9,34.7) 61.7,33.9 62.4,33.9 64.4,35.9 64.4,38.6 65.3,39.5 65.3,45 67.096,46.796 67.096,48.604 66.4,49.3 v1(65.75,49.3)
SDO: U1.10 U7.55 | length 23.6
  Top Layer w0.25: v1(61.4,32.2) 61.467,32.267 61.567,32.267 61.95,32.65 U7.55@61.95,33.5 ; U1.10@66.988,50.25 67.013,50.225 67.918,50.225 68.114,50.029 v1(68.209,50.029)
  SIG w0.25: v1(61.4,32.2) 61.495,32.2 61.67,32.375 61.675,32.375 65,35.7 65,38.4 65.9,39.3 65.9,44.6 67.6,46.3 67.6,49.42 v1(68.209,50.029)
SENS_A: C20.1 R7.1 R9.1 U7.14 | length 15.6
  Top Layer w0.25: R7.1@43.2,25.3 R9.1@43.2,24.4 C20.1@44.4,24.4 ; C20.1@44.4,24.425 45.1,23.725 45.1,23.1 46,22.2 51.2,22.2 54,25 U7.14@55.45,25
SENS_B: C21.1 R8.1 R10.1 U7.15 | length 21.6
  Top Layer w0.25: R8.1@39.3,24.4 R10.1@39.3,23.5 C21.1@40.5,23.5 41.2,22.8 41.2,20.7 41.9,20 44.4,20 45.9,21.5 51.5,21.5 54.485,24.485 55.435,24.485 U7.15@55.45,24.5
SENS_C: C22.1 R13.1 R14.1 U7.16 | length 29.3
  Top Layer w0.25: R13.1@32,20.8 R14.1@33,20.8 C22.1@33,22 33.7,22.7 36.2,22.7 37.3,21.6 37.3,19.859 37.859,19.3 44.8,19.3 46.3,20.8 51.8,20.8 54.975,23.975 55.425,23.975 U7.16@55.45,24
SERVO: U7.58
SH_A: C9.2 Q2.1 Q2.2 Q2.3 Q2.4 Q5.6 R7.2 R24.2 U1.46 U8.8 | length 39
  Top Layer w0.25: U8.8@42.8,39.675 42.8,39.8 44.6,41.6 R24.2@44.6,42.3 ; v1(55.1,42.7) 55.1,43.9 54.45,44.55 54.45,46.45 54.55,46.55 C9.2@54.55,47.3 54.767,47.517 54.767,47.963 57.554,50.75 U1.46@59.412,50.75
  SIG w0.25: v1(47.2,42.5) 47.221,42.5 47.521,42.8 51.5,42.8 52.5,41.8 54.2,41.8 v1(55.1,42.7)
  SIG/PWR w0.5: v1(42.2,25.3) 42.2,25.9 43.3,27 43.3,34.3 44.4,35.4 v1(44.4,39.7)
  other v1: 48.6,38.3 45.8,39.7 47.2,39.7 48.6,39.7 40.2,41.1 41.6,41.1 43,41.1 44.4,41.1 45.8,41.1 40.2,42.5 41.6,42.5 43,42.5 44.4,42.5 45.8,42.5 40.2,43.9 41.6,43.9 43,43.9 44.4,43.9 45.8,43.9
SH_B: C12.2 Q3.1 Q3.2 Q3.3 Q3.4 Q6.6 R8.2 R25.2 U1.41 U9.8 | length 45.5
  Top Layer w0.25: U9.8@42.8,48.075 42.8,48.2 44.6,50 R25.2@44.6,50.7 ; v1(51.6,50.925) 52.275,51.6 54.35,51.6 C12.2@54.6,51.35 54.6,51.8 56.05,53.25 U1.41@59.412,53.25
  SIG w0.25: v1(47.2,50.9) 49.216,50.9 49.341,50.775 51.355,50.775 51.505,50.925 v1(51.6,50.925)
  SIG/PWR w0.5: v1(38.3,24.4) 38.3,25.7 39.6,27 39.6,30.5 41.3,32.2 41.3,33.7 39.4,35.6 39.4,37.1 40.1,37.8 40.1,39.9 39,41 39,44.4 40.2,45.6 v1(40.2,49.5)
  other v1: 48.6,46.7 44.4,48.1 45.8,48.1 47.2,48.1 48.6,48.1 41.6,49.5 43,49.5 44.4,49.5 45.8,49.5 40.2,50.9 41.6,50.9 43,50.9 44.4,50.9 45.8,50.9 40.2,52.3 41.6,52.3 43,52.3 44.4,52.3 45.8,52.3
SH_C: C16.2 Q4.1 Q4.2 Q4.3 Q4.4 Q7.6 R13.2 R26.2 U1.36 U10.8 | length 60.2
  Top Layer w0.25: U10.8@42.8,56.475 42.8,56.6 44.6,58.4 R26.2@44.6,59.1 ; v1(47.2,59.3) 48.4,60.5 50.8,60.5 54.835,56.465 55.285,56.465 C16.2@55.5,56.25 56.35,56.25 56.85,55.75 U1.36@59.412,55.75
  SIG/PWR w0.5: v1(32,19.8) 32,26.2 35.8,30 35.8,50.7 36.9,51.8 38.1,51.8 40.2,53.9 v1(40.2,57.9)
  other v1: 48.6,54.85 48.6,56.15 44.4,56.5 45.8,56.5 47.2,56.5 41.6,57.9 43,57.9 44.4,57.9 45.8,57.9 40.2,59.3 41.6,59.3 43,59.3 44.4,59.3 45.8,59.3 40.2,60.7 41.6,60.7 43,60.7 44.4,60.7 45.8,60.7
SWCLK: J2.4 U7.49 | length 10.7
  Top Layer w0.25: v1(61.25,24.375) 61.25,28.55 64.935,32.235 64.935,33.485 U7.49@64.95,33.5
SWDIO: J2.2 U7.46 | length 10.8
  Top Layer w0.25: v1(63.75,24.375) 61.85,26.275 61.85,28.35 64,30.5 U7.46@66.95,30.5
TEMP_MOTOR: U7.24
TX_SCL_MOSI: U7.23 U7.29 | length 4.6
  Top Layer w0.25: U7.23@60.45,22 60.475,22.025 60.475,22.735 60.665,22.925 63.235,22.925 63.425,22.735 63.425,22.025 U7.29@63.45,22
VBAT: C4.1 C19.1 C39.1 C40.1 C41.1 C42.1 C43.1 C44.1 C54.1 C55.1 D3.2 J3.P04_1 J3.P04_2 J3.P04_3 J3.P04_4 J3.P04_5 J3.P04_6 Q2.6 Q3.6 Q4.6 R11.2 U1.29 U1.53 U1.54 | length 17.2
  Bottom Layer w1: Q2.6@55.363,38.6 C39.1@57.475,38.6 ; Q2.6@55.363,40.8 C42.1@57.475,40.8 ; Q3.6@55.7,44.7 C43.1@58.975,44.7 ; Q3.6@55.7,49.8 C40.1@58.975,49.8 ; Q4.6@55.7,53 C44.1@58.975,53 ; Q4.6@55.8,57.9 C41.1@58.975,57.9
  other v1: 47,23.2 59,47 59.7,47 58.9,59.4 59.9,59.4 59.5,60.2 60.5,60.2 63.65,60.8 60.1,61
pads on no net: J2.6 J2.7 J3. U1.4 U1.5 U1.12 U1.25 U1.26 U7.3 U7.4 U8.4 U9.4 U10.4

## Polygon pours and split planes (outlines as drawn)
VBAT on Bottom Layer "VBAT_BOT" (solid, remove dead copper, pour order 20): 25.4,18.5 53.5,18.5 66.5,31.5 66.5,63 50.5,63 50.5,35.5 49.7,34.7 25.4,34.7
GND on Bottom Layer "GND_BOT" (solid, pour order 29): 61.8,35.8 64,35.8 64,39.2 61.8,39.2
+5 on Bottom Layer "5V_BOT" (solid, pour order 27): 67.9,36.2 67.9,39.2 66.9,40.2 66.9,41.2 67.8,42.1 67.8,48.2 69.7,48.2 69.7,46 71.2,44.5 71.2,43.3 72,42.5 72.8,42.5 72.8,39.9 72.3,39.9 69.9,37.5 69.9,36.2
SH_A on Bottom Layer "SH_A_BOT" (solid, pour order 9): 49.2,35.2 43.9,35.2 41.8,37.3 39.9,37.3 39.9,44.5 45.9,44.5 49.2,41.2
GND on Bottom Layer "GND_BOT" (solid, pour order 25): 39.3,34.9 39.3,63 25.4,63 25.4,34.9
GND on Bottom Layer "GNDC_BOT" (solid, remove dead copper, pour order 6): 39.3,59.4 39.3,54.4 35,54.4 35,54.9 36.4,56.3 36.4,59.4
GND on Bottom Layer "GNDB_BOT" (solid, pour order 13): 36,51 36,46.8 36.8,46 39.3,46 39.3,51
GND on Bottom Layer "GNDA_BOT" (solid, pour order 16): 36,42.6 36,37.6 39.3,37.6 39.3,42.6
SH_C on Bottom Layer "SH_C_BOT" (solid, pour order 3): 49.2,51.8 47.4,51.8 45.1,54.1 39.9,54.1 39.9,61.3 45.8,61.3 49.2,57.9
SH_B on Bottom Layer "SH_B_BOT" (solid, pour order 8): 49.2,43.6 47.4,43.6 45.3,45.7 39.9,45.7 39.9,52.9 45.8,52.9 49.2,49.5
GND on Top Layer "GND_TOP" (solid, pour order 36): 61.4,56 61.4,59.7 65,59.7 65,56
VBAT on Top Layer "VBAT_DRV_TOP" (solid, pour order 33): 59.7,61.5 59.7,60.8 58.6,59.7 58.6,59.1 60.2,59.1 60.8,59.7 60.8,61.5
+3.3 on Top Layer "3.3V_TOP" (solid, pour order 31): 36.5,32 36.5,29.1 36.9,28.7 37.5,28.7 37.5,32
GND on Top Layer "GND_BOT" (solid, pour order 30): 70.5,37 74.5,37 74.5,35 70.5,35
+3.3 on Top Layer "3.3V_TOP" (solid, pour order 28): 63.1,40.1 63.1,39.8 69.3,39.8 70.5,41 70.5,43 73.5,43 73.5,40.6 70.4,37.5 63.1,37.5 63.1,36.7 61.4,36.7 60.3,35.6 59.3,35.6 59.3,37 60.9,38.6 60.9,40.1
NetC5_2 on Top Layer "NetC5_2_TOP" (solid, pour order 24): 58.675,48.85 58.675,48.15 60.25,48.15 62.2,46.2 62.2,40.6 64.1,40.6 64.1,48.1 63.35,48.85
SH_C on Top Layer "SH_C_TOP" (solid, pour order 7): 45.8,61.3 49.2,57.9 49.2,54.5 48.4,54.5 46.7,56.2 44.2,56.2 42.8,57.6 39.9,57.6 39.9,61.3
PH_B on Top Layer "PH_B" (solid, pour order 12): 37.5,48.7 36.6,49.6 36,49.6 35.8,49.4 27.1,49.4 27.1,53.9 37.1,53.9 38.3,52.7 39.3,52.7 39.3,48.7
PH_A on Top Layer "PH_A" (solid, pour order 15): 27.1,48.9 36.5,48.9 36.5,46 38.1,44.4 39.3,44.4 39.3,40.3 37.5,40.3 36.7,41.1 36.7,42.1 34.5,44.3 27.1,44.3
PH_C on Top Layer "PH_C" (solid, pour order 5): 39.3,57.1 37,57.1 34.3,54.4 27.1,54.4 27.1,58.4 29.8,61.1 39.3,61.1
SH_B on Top Layer "SH_B_TOP" (solid, pour order 10): 49.2,46.4 48.4,46.4 47,47.8 44.2,47.8 42.8,49.2 39.9,49.2 39.9,52.9 46.1,52.9 49.2,49.8
SH_A on Top Layer "SH_A_TOP" (solid, pour order 11): 49.2,38 48.4,38 47,39.4 44.2,39.4 42.8,40.8 39.9,40.8 39.9,44.5 46.3,44.5 49.2,41.6
+3.3 on SIG/PWR "3.3_L4" (solid, pour order 35): 59.3,35.6 59.3,37 62.1,39.8 67.7,39.8 67.7,37.9 66.8,37 64.7,37 64.2,37.5 62.2,37.5 60.3,35.6
GND on GND2 (split plane): 72.617,62.482 72.833,62.454 73.045,62.407 73.252,62.342 73.453,62.258 73.646,62.158 73.829,62.041 74.002,61.909 74.162,61.762 74.309,61.602 74.441,61.429 74.558,61.246 74.658,61.053 74.742,60.852 74.807,60.645 74.854,60.433 74.882,60.217 74.891,60.016 74.89,60 74.89,21.5 74.891,21.484 74.882,21.283 74.854,21.067 74.807,20.855 74.742,20.648 74.658,20.447 74.558,20.254 74.441,20.071 74.309,19.898 74.162,19.738 74.002,19.591 73.829,19.459 73.646,19.342 73.453,19.242 73.252,19.158 73.045,19.093 72.833,19.046 72.617,19.018 72.416,19.009 72.4,19.01 27.4,19.01 27.385,19.009 27.233,19.018 27.068,19.046 26.907,19.092 26.753,19.156 26.606,19.237 26.47,19.334 26.345,19.445 26.234,19.57 26.137,19.706 26.056,19.853 25.992,20.007 25.946,20.168 25.918,20.333 25.909,20.485 25.91,20.5 25.91,62.49 72.4,62.49 72.416,62.491
GND on GND (split plane): 72.617,62.482 72.833,62.454 73.045,62.407 73.252,62.342 73.453,62.258 73.646,62.158 73.829,62.041 74.002,61.909 74.162,61.762 74.309,61.602 74.441,61.429 74.558,61.246 74.658,61.053 74.742,60.852 74.807,60.645 74.854,60.433 74.882,60.217 74.891,60.016 74.89,60 74.89,21.5 74.891,21.484 74.882,21.283 74.854,21.067 74.807,20.855 74.742,20.648 74.658,20.447 74.558,20.254 74.441,20.071 74.309,19.898 74.162,19.738 74.002,19.591 73.829,19.459 73.646,19.342 73.453,19.242 73.252,19.158 73.045,19.093 72.833,19.046 72.617,19.018 72.416,19.009 72.4,19.01 27.4,19.01 27.385,19.009 27.233,19.018 27.068,19.046 26.907,19.092 26.753,19.156 26.606,19.237 26.47,19.334 26.345,19.445 26.234,19.57 26.137,19.706 26.056,19.853 25.992,20.007 25.946,20.168 25.918,20.333 25.909,20.485 25.91,20.5 25.91,62.49 72.4,62.49 72.416,62.491
GND on GND (split plane): 53.473,32.247 53.473,31.6 53.482,31.551 53.51,31.51 55.21,29.81 55.251,29.782 55.3,29.773 56.973,29.773 56.973,28.727 53.5,28.727 53.451,28.718 53.41,28.69 52.347,27.627 48.427,27.627 48.427,33.573 52.147,33.573

## Other copper
GND (plane layer: these items are gaps in the copper):
  lines w0.25: 48.3,27.5 48.3,33.7 52.2,33.7 53.6,32.3 53.6,31.6 55.3,29.9 57.1,29.9 57.1,28.6 53.5,28.6 52.4,27.5 48.3,27.5

## Silkscreen, mask and mechanical layers (free items; w line width, h text height)
Mechanical 1:
  the board outline again, w0.254

## Text inside footprints (layer, text, board x,y; h text height)
C54: Top Overlay "+" at 46,32.263 h1.5
C55: Top Overlay "+" at 52.1,61.737 h1.5 r180
J3: Top 3D Body "PCB Edge" at 26,23.85 h0.81 r270